# Altium PCB BioSig.PcbDoc
Units mm, origin at the board's own origin, x right, y up, seen from the top; angles counter-clockwise.
Board outline 53.34 x 66.19 mm, 2 copper layers (Top Layer, Bottom Layer); 27 components, 24 nets, 153 pads, 0 vias.
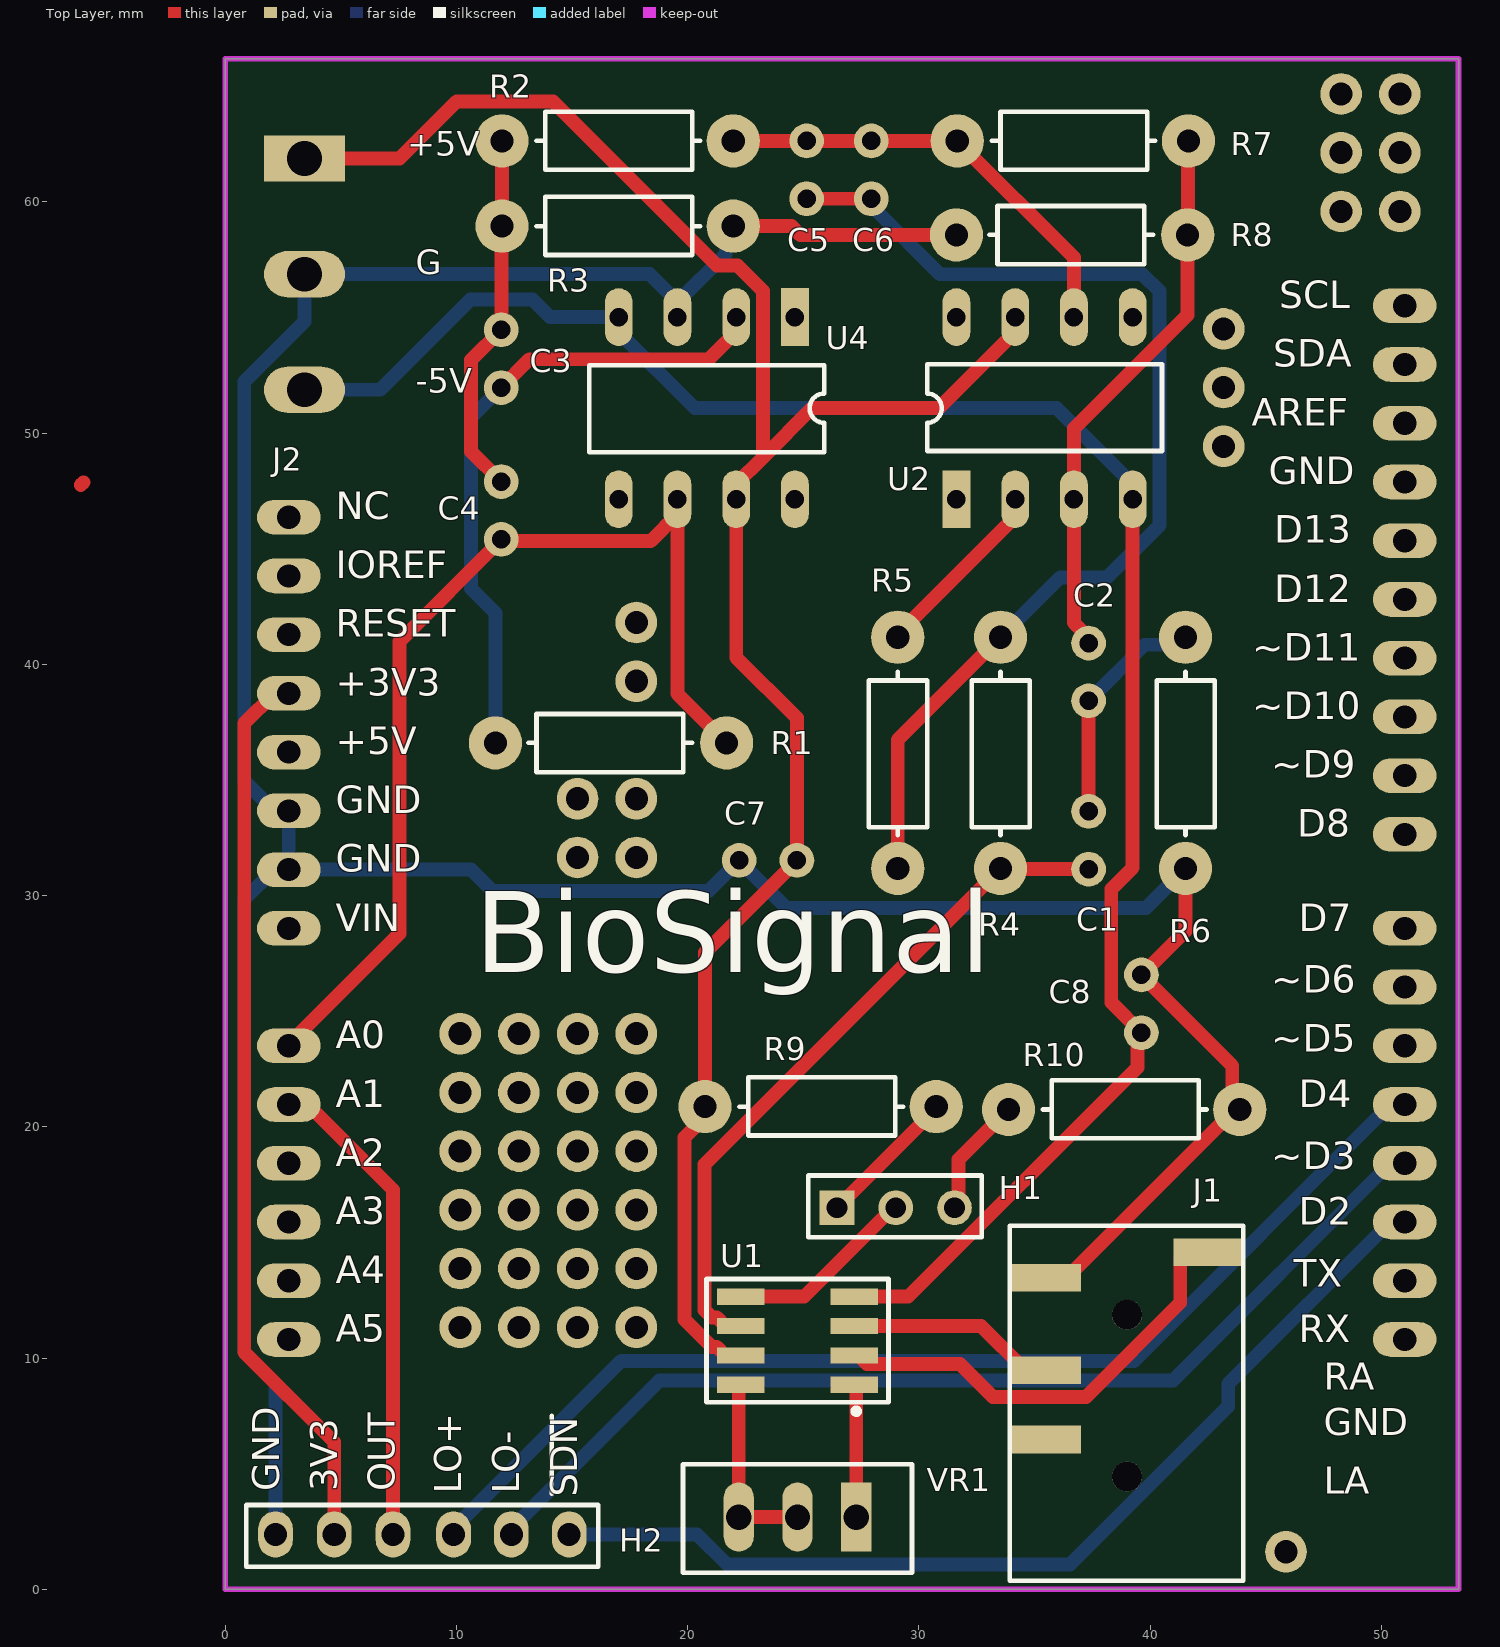
[diagram p0: Top Layer view]
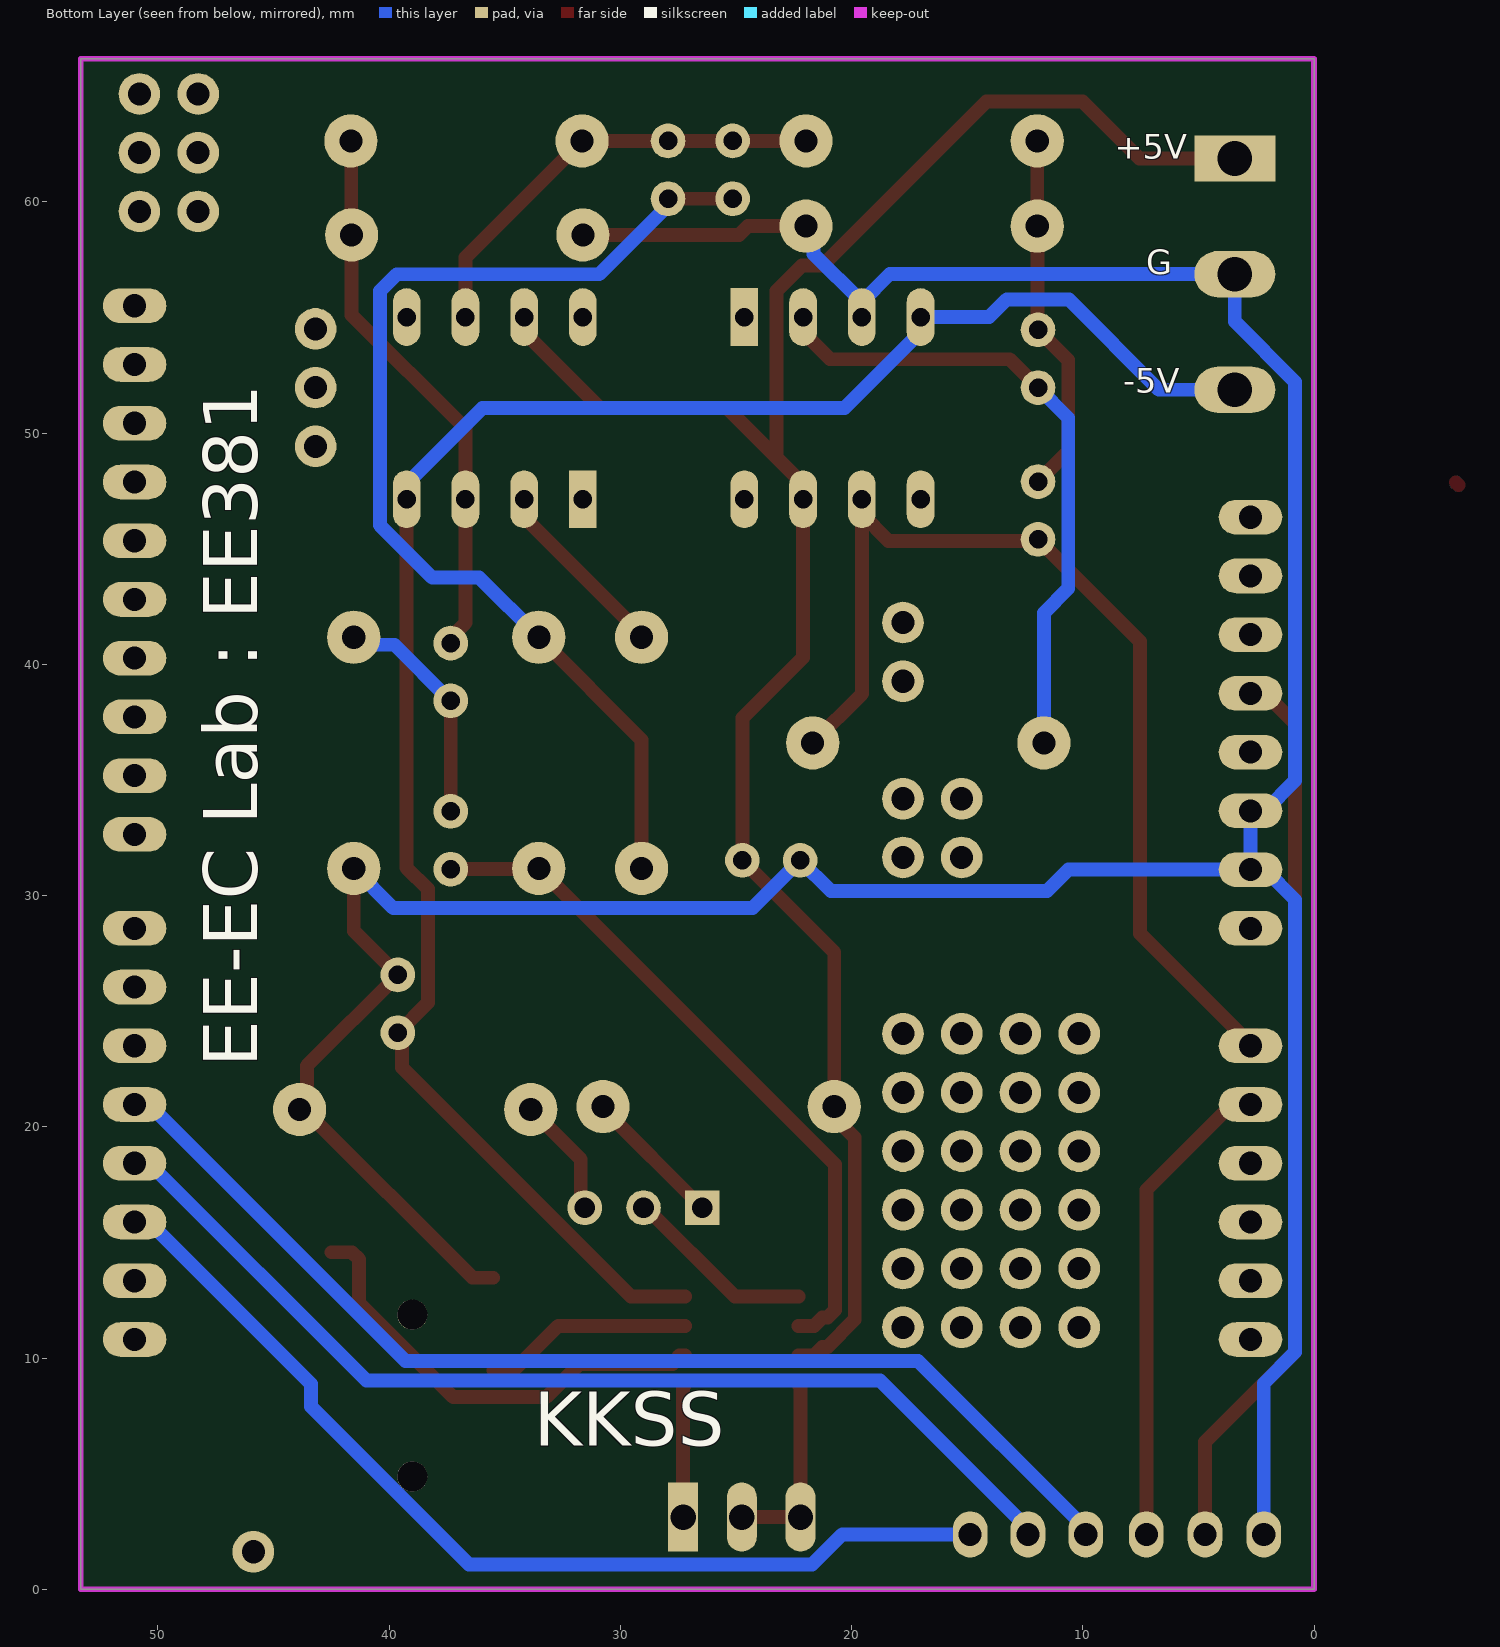
[diagram p1: Bottom Layer view, seen from below]

## Layer stack, top to bottom
Top Solder: solder mask 0.0102, Solder Resist, Dk 3.5
Top Layer: signal copper 0.0356
Dielectric 1: dielectric 0.32, FR-4, Dk 4.8
Bottom Layer: signal copper 0.0356
Bottom Solder: solder mask 0.0102, Solder Resist, Dk 3.5

## Board outline
0,0 53.34,0 53.34,66.194 0,66.194

## Design rules (kind name [scope] priority, off if disabled: settings)
Clearance [All] p1: gap=0.254 ignorepadtopadclearanceinfootprint=FALSE except(0: Arc-Hole Track-Hole SMDPad-Hole THPad-Hole Via-Hole Fill-Hole Poly-Hole Region-Hole Text-Hole)
PolygonConnect [All] p1: connectstyle=Relief reliefconductorwidth=0.254 reliefentries=4 polygonreliefangle="90 Angle" airgapwidth=0.254
RoutingVias [All] p1: holewidth=0.711 width=1.27 viastyle="Through Hole" minholewidth=0.711 minwidth=1.27 maxholewidth=0.711 maxwidth=1.27
SolderMaskExpansion [All] p1: expansion=0.102 istentingtop=FALSE
Width [All] p1: maxlimit=2 minlimit=0.254 preferedwidth=0.6 minimp=50.000000 maximp=50.000000 favimp=50.000000
30 further rules are at their usual default settings.

## Components (designator, comment, footprint, x,y, rotation, side; value= is the part's Value field where it differs from the comment)
BioSignal "ArduinoUnoShield" ArduinoUnoShield 51.01,28.585 r0 top (schematic designator BioSig)
C1 "Ceramic" Ceramic_Disc_P3.0 37.338,31.142 r90 top
C2 "Ceramic" Ceramic_Disc_P3.0 37.338,38.421 r90 top
C3 "Ceramic" Ceramic_Disc_P3.0 11.938,54.47 r270 top
C4 "Ceramic" Ceramic_Disc_P3.0 11.938,47.906 r270 top
C5 "Ceramic" Ceramic_Disc_P3.0 25.146,60.138 r90 top
C6 "Ceramic" Ceramic_Disc_P3.0 27.94,60.138 r90 top
C7 "Ceramic" Ceramic_Disc_P3.0 22.225,31.523 r0 top
C8 "Ceramic" Ceramic_Disc_P3.0 39.624,24.07 r90 top
H1 "Pin_Header_3x1_2.54" Pin_Header_3x1_2.54 29,16.5 r90 top
H2 "Pin_Header_6x1_2.54" Pin_Header_6x1_2.54 14.875,2.375 r270 top
J1 "Stereo_Jack" Stereo_Jack 39,4.875 r90 top
J2 "3P-5.0mm-Terminal-Block" 3P_5.0mm 3.429,56.876 r0 top
R1 "Resistor" Axial_10mm_0.7mm 11.684,36.603 r0 top
R2 "Resistor" Axial_10mm_0.7mm 21.971,62.638 r180 top
R3 "Resistor" Axial_10mm_0.7mm 21.971,58.955 r180 top
R4 "Resistor" Axial_10mm_0.7mm 33.528,31.175 r90 top
R5 "Resistor" Axial_10mm_0.7mm 29.083,31.175 r90 top
R6 "Resistor" Axial_10mm_0.7mm 41.529,31.175 r90 top
R7 "Resistor" Axial_10mm_0.7mm 41.656,62.638 r180 top
R8 "Resistor" Axial_10mm_0.7mm 31.623,58.574 r0 top
R9 "Resistor" Axial_10mm_0.7mm 30.75,20.875 r180 top
R10 "Resistor" Axial_10mm_0.7mm 43.875,20.75 r180 top
U1 "INA128" SOIC127P600X265-8N 24.75,10.75 r180 top
U2 "Op Amp" PDIP8 35.433,51.081 r90 top
U4 "Op Amp" PDIP8 20.828,51.081 r270 top
VR1 "VR" TrimPot 27.29,3.125 r270 top

## Footprints (in the part's own frame and the unit in brackets; to place one, negate y for a bottom-side part, rotate by r counter-clockwise, add the part's x,y. Pads: shape width x height; smd on the part's side, far side on the other; paste and mask are expansions set on the pad)
3P_5.0mm [mm]
  rect 3.5x2 hole 1.5: 1(0,5)
  oval 3.5x2 hole 1.5: 2(0,0) 3(0,-5)
  body extent -3.11,-7.39 4.49,7.61, height 9.8
ArduinoUnoShield [mm]
  oval 2.75x1.5 hole 1: 1(-48.26,17.78) 2(-48.26,15.24) 3(-48.26,12.7) 4(-48.26,10.16) 5(-48.26,7.62) 6(-48.26,5.08) 7(-48.26,2.54) 8(-48.26,0) 9(-48.26,-5.08) 10(-48.26,-7.62) 11(-48.26,-10.16) 12(-48.26,-12.7) 13(-48.26,-15.24) 14(-48.26,-17.78) 15(0,-17.78) 16(0,-15.24) 17(0,-12.7) 18(0,-10.16) 19(0,-7.62) 20(0,-5.08) 21(0,-2.54) 22(0,0) 23(0,4.064) 24(0,6.604) 25(0,9.144) 26(0,11.684) 27(0,14.224) 28(0,16.764) 29(0,19.304) 30(0,21.844) 31(0,24.384) 32(0,26.924)
  body extent -49.51,-19.05 1.24,28.19, height 2.5
Axial_10mm_0.7mm [mm]
  round 2.3 hole 1: 1(0,0) 2(10,0)
  silkscreen extent 1.43,-1.27 8.51,1.25, body extent -0.3,-1.2 10.46,1.2, height 2.41
Ceramic_Disc_P3.0 [mm]
  round 1.5 hole 0.8: 1(0,0) 2(2.5,0)
  body extent -0.46,-0.75 3.02,0.75, height 3.5
PDIP8 [mm]
  rect 2.5x1.2 hole 0.8: 1(-3.937,3.81)
  oval 2.5x1.2 hole 0.8: 2(-3.937,1.27) 3(-3.937,-1.27) 4(-3.937,-3.81) 5(3.937,-3.81) 6(3.937,-1.27) 7(3.937,1.27) 8(3.937,3.81)
  silkscreen extent -1.85,-5.08 1.91,5.08, body extent -3.93,-4.7 3.94,4.7, height 4.36
Pin_Header_3x1_2.54 [mm]
  rect 1.5x1.5 hole 0.9: 1(0,2.54)
  round 1.5 hole 0.9: 2(0,0) 3(0,-2.54)
  silkscreen extent -1.27,-3.71 1.4,3.79, body extent -1.09,-3.81 1.4,3.81, height 8.54
Pin_Header_6x1_2.54 [mm]
  oval 2x1.5 hole 1: 1(0,0) 2(0,-2.5) 3(0,-5) 4(0,-7.62) 5(0,-10.16) 6(0,-12.7)
  silkscreen extent -1.27,-13.97 1.4,1.25, body extent -1.22,-13.97 1.27,1.27, height 3
SOIC127P600X265-8N [mm] "SOIC, 8-Leads, Body 4.95x3.95mm, Pitch 1.27mm, IPC Medium Density"
  rect 2.05x0.7 smd: 1(-2.45,1.905) 2(-2.45,0.635) 3(-2.45,-0.635) 4(-2.45,-1.905) 5(2.45,-1.905) 6(2.45,-0.635) 7(2.45,0.635) 8(2.45,1.905)
  silkscreen extent -3.94,-2.67 3.94,3.17, body extent -3,-2.45 3,2.45, height 1.75
Stereo_Jack [mm] "SOIC, 8-Leads, Body 4.95x3.95mm, Pitch 1.27mm, IPC Medium Density"
  round 1.3 hole 1.3: 0(0,0) 0(7,0)
  rect 1.2x3 smd: 1(9.7,-3.5) 2(8.6,3.5) 3(4.6,3.5) 4(1.6,3.5)
  silkscreen extent -4.5,-5.03 10.85,5.08, body extent -3.55,-3.93 10.65,4.07, height 5
TrimPot [mm] "Vishay"
  rect 3x1.3 hole 1.1: 1(0,0)
  oval 3x1.3 hole 1.1: 2(0,-2.54) 3(0,-5.08)
  silkscreen extent -2.29,-7.49 2.41,2.41, body extent -2.16,-7.34 2.44,2.26, height 11.15

## Part data
C1 C2 C3 C4 C5 C6 C7 C8: library part Capacitor
U2 U4: library part UA741, "UA741-DIP"
VR1: library part TrimPot

## Free pads (board coordinates)
  round 1.8 hole 1: 39(10.16,24.03) 40(12.7,24.03) 41(15.24,24.03) 43(17.78,21.49) 44(15.24,21.49) 45(12.7,21.49) 46(10.16,21.49) 47(10.16,18.95) 48(12.7,18.95) 49(15.24,18.95) 50(17.78,18.95) 51(17.78,16.41) 52(15.24,16.41) 53(12.7,16.41) 54(10.16,16.41) 55(10.16,13.87) 56(12.7,13.87) 57(15.24,13.87) 58(17.78,13.87) 59(17.78,11.33) 60(12.7,11.33) 61(15.24,11.33) 62(10.16,11.33) 65(48.26,64.67) 66(50.8,64.67) 67(50.8,62.13) 68(48.26,62.13) 69(48.26,59.59) 70(50.8,59.59) 71(43.18,49.43) 72(43.18,51.97) 73(43.18,54.51) 74(17.78,24.03) 76(45.875,1.625) 80(15.24,34.19) 81(17.78,34.19) 82(17.78,31.65) 83(15.24,31.65) 90(17.78,41.81) 91(17.78,39.27)

## Nets (pads, with @x,y where several pads share a name; then routed paths per layer and width w, separated by ;. In a path a pad name is that pad's centre, name@x,y a point inside that pad or via, vN(x,y) a via of type N, cw(c..) or ccw(c..) an arc to the next point about the centre after c; other vN are vias at no path point)
3V3: BioSignal.4 H2.5 | length 39.1
  Top Layer w0.6: BioSignal.4 2.125,38.745 0.821,37.441 0.821,10.265 4.715,6.371 H2.5
+5V: C7.2 J2.1 R9.2 U1.7 U2.7 U4.7 | length 89.2
  Top Layer w0.6: J2.1 7.545,61.876 10.011,64.342 14.174,64.342 21.265,57.251 22.147,57.251 23.252,56.146 23.252,48.948 ; U1.7 21.625,10.115 21.259,10.481 21.046,10.481 19.867,11.66 19.867,19.532 20.75,20.415 R9.2 20.75,27.548 C7.2 24.725,37.678 22.098,40.305 U4.7 22.098,47.794 23.252,48.948 ; U2.7 34.163,54.368 30.876,51.081 25.385,51.081 23.252,48.948
-5V: C8.1 J2.3 U1.4 U2.4 U4.4 | length 83.7
  Top Layer w0.6: U1.4 29.539,12.655 39.452,22.568 39.452,23.898 C8.1 38.32,25.374 38.32,30.28 39.243,31.203 U2.4
  Bottom Layer w0.6: J2.3 6.703,51.876 10.601,55.774 13.293,55.774 14.049,55.018 U4.4 17.018,54.368 20.305,51.081 35.956,51.081 39.243,47.794 U2.4
GND: BioSignal.6 BioSignal.7 C7.1 C8.2 H2.6 J1.2 J2.2 R3.1 R6.1 R8.1 R10.1 U4.3 | length 155.5
  Top Layer w0.6: R3.1 24.485,58.955 24.866,58.574 R8.1 ; J1.2 36.4,13.475 43.675,20.75 R10.1 43.55,21.075 43.55,22.644 C8.2 41.529,28.475 R6.1
  Bottom Layer w0.6: H2.6 2.175,8.911 0.821,10.265 0.821,29.821 2.125,31.125 BioSignal.7 ; U4.3 U4.3@19.558,55.668 ; R3.1 21.646,58.63 21.646,57.756 U4.3@19.558,55.668 ; R6.1 39.825,29.471 24.277,29.471 C7.1 20.898,30.196 11.551,30.196 10.622,31.125 BioSignal.7 ; BioSignal.7 BioSignal.6 2.125,33.665 0.821,34.969 0.821,52.216 3.429,54.824 J2.2 18.35,56.876 U4.3@19.558,55.668
LA: J1.3 U1.3 | length 9.1
  Top Layer w0.6: U1.3 32.69,11.385 34.6,9.475 J1.3
NetBioSig_9: BioSignal.9 C4.2 R1.2 U4.6 | length 45.7
  Top Layer w0.6: BioSignal.9@2.5,23.95 3.125,23.95 7.532,28.357 7.532,41 C4.2 12.004,45.34 18.404,45.34 U4.6@19.558,46.494 ; U4.6 U4.6@19.558,46.494 ; R1.2 19.558,38.729 U4.6@19.558,46.494
  Bottom Layer w0.6: C4.2@11.75,45.75 11.75,45.594 C4.2
NetBioSig_10: BioSignal.10 H2.4 | length 21.4
  Top Layer w0.6: BioSignal.10@2.5,21.41 3.125,21.41 7.255,17.28 H2.4
NetBioSig_17: BioSignal.17 H2.1 | length 43.4
  Bottom Layer w0.6: H2.1 20.407,2.375 21.711,1.071 36.54,1.071 43.376,7.908 43.376,8.876 50.385,15.885 BioSignal.17
NetBioSig_18: BioSignal.18 H2.2 | length 45.4
  Bottom Layer w0.6: H2.2 12.375,2.625 18.772,9.022 40.982,9.022 50.385,18.425 BioSignal.18
NetBioSig_19: BioSignal.19 H2.3 | length 49
  Bottom Layer w0.6: H2.3 9.875,2.625 17.126,9.876 39.296,9.876 50.385,20.965 BioSignal.19
NetC1_1: C1.1 R4.1 U1.6 | length 30.1
  Top Layer w0.6: U1.6 21.625,11.385 21.259,11.751 21.046,11.751 20.721,12.076 20.721,18.368 R4.1 33.544,31.159 37.322,31.159 C1.1
NetC1_2: C1.2 C2.1 R6.2 | length 10.1
  Top Layer w0.6: C1.2 C2.1
  Bottom Layer w0.6: C2.1 39.767,40.85 41.204,40.85 R6.2
NetC2_2: C2.2 R7.1 R8.2 U2.3 | length 24
  Top Layer w0.6: C2.2 37.338,41.165 36.703,41.8 U2.3 36.703,50.196 41.623,55.116 R8.2 41.64,58.591 41.64,62.622 R7.1
NetC3_1: C3.1 C4.1 R2.2 R3.2 | length 15.9
  Top Layer w0.6: C4.1 10.634,49.21 10.634,53.166 C3.1 11.954,54.487 11.954,58.939 R3.2 R2.2
  Bottom Layer w0.6: C4.1@11.875,48 11.875,47.969 C4.1
NetC3_2: C3.2 R1.1 U4.2 | length 28.1
  Top Layer w0.6: C3.2 13.166,53.198 20.928,53.198 22.098,54.368 U4.2
  Bottom Layer w0.6: R1.1 11.684,42.23 10.634,43.28 10.634,50.666 C3.2
NetC5_1: C5.1 C6.1 R4.2 R5.1 | length 47.9
  Top Layer w0.6: C5.1 C6.1 ; R5.1 29.083,36.73 R4.2
  Bottom Layer w0.6: C6.1 28.112,59.966 28.112,59.675 30.917,56.87 39.673,56.87 40.397,56.146 40.397,46.016 38.139,43.758 36.111,43.758 R4.2
NetC5_2: C5.2 C6.2 R2.1 R7.2 U2.6 | length 19.4
  Top Layer w0.6: R2.1 C6.2 R7.2 36.703,57.591 U2.6
NetH1_1: H1.1 R9.1 | length 6.2
  Top Layer w0.6: H1.1 30.75,20.79 R9.1
NetH1_2: H1.2 U1.5 | length 8.3
  Top Layer w0.6: U1.5 25.042,12.655 28.887,16.5 H1.2
NetH1_3: H1.3 R10.2 | length 5.2
  Top Layer w0.6: H1.3 31.712,16.672 31.712,18.587 R10.2
NetR5_2: R5.2 U2.2 | length 8.1
  Top Layer w0.6: R5.2 29.083,41.294 34.163,46.374 U2.2
NetU1_1: U1.1 VR1.1 | length 5.8
  Top Layer w0.6: U1.1 27.24,8.845 27.29,8.795 VR1.1
NetU1_8: U1.8 VR1.2 VR1.3 | length 8.3
  Top Layer w0.6: U1.8 22.26,8.845 22.21,8.795 VR1.3 VR1.2
RA: J1.1 U1.2 | length 19.8
  Top Layer w0.6: U1.2 27.45,10.115 27.5,10.065 27.5,10 27.751,9.749 31.776,9.749 33.204,8.321 37.229,8.321 41.3,12.392 41.3,14.275 41.6,14.575 J1.1
pads on no net: BioSignal.1 BioSignal.2 BioSignal.3 BioSignal.5 BioSignal.8 BioSignal.11 BioSignal.12 BioSignal.13 BioSignal.14 BioSignal.15 BioSignal.16 BioSignal.20 BioSignal.21 BioSignal.22 BioSignal.23 BioSignal.24 BioSignal.25 BioSignal.26 BioSignal.27 BioSignal.28 BioSignal.29 BioSignal.30 BioSignal.31 BioSignal.32 J1.0 J1.4 U2.1 U2.5 U2.8 U4.1 U4.5 U4.8
copper on no net: | length 0.2
  Top Layer w0.6: -6.25,47.75 -6.125,47.875

## Keep-outs
Keep-Out Layer:
  the board outline again, w0.254

## Silkscreen, mask and mechanical layers (free items; w line width, h text height)
Top Overlay:
  lines w0.2: 14.125,4.125 14.125,7.5
  text "+5V" at 7.875,61.644 h1.8
  text "G" at 8.25,56.519 h1.8
  text "-5V" at 8.25,51.394 h1.8
  text "RA" at 47.5,8.25 h2
  text "GND" at 47.5,6.272 h2
  text "GND" at 2.728,4.25 h2 r90
  text "3V3" at 5.228,4.25 h2 r90
  text "OUT" at 7.728,4.25 h2 r90
  text "LO+" at 10.603,4.125 h2 r90
  text "LO-" at 13.103,4.125 h2 r90
  text "SDN" at 15.603,4 h2 r90
  text "LA" at 47.5,3.75 h2
Bottom Overlay:
  text "+5V" at 8.625,61.519 h1.8
  text "G" at 7.25,56.519 h1.8
  text "-5V" at 8.25,51.394 h1.8
  text "EE-EC Lab : EE381" at 44.922,22.567 h4 r270
  text "KKSS" at 33.75,5.419 h4

## Text inside footprints (layer, text, board x,y; h text height)
BioSignal: Top Overlay "SCL" at 45.591,55.023 h2.03; Top Overlay "RX" at 46.438,10.297 h2.03; Top Overlay "TX" at 46.205,12.695 h2.03; Top Overlay "D4" at 46.438,20.457 h2.03; Top Overlay "~D5" at 45.237,22.866 h2.03; Top Overlay "D2" at 46.438,15.377 h2.03; Top Overlay "~D3" at 45.247,17.783 h2.03; Top Overlay "~D6" at 45.247,25.403 h2.03; Top Overlay "D7" at 46.438,28.077 h2.03; Top Overlay "A5" at 4.78,10.319 h2.03; Top Overlay "A4" at 4.78,12.837 h2.03; Top Overlay "A3" at 4.78,15.399 h2.03; Top Overlay "A2" at 4.78,17.917 h2.03; Top Overlay "A1" at 4.78,20.457 h2.03; Top Overlay "A0" at 4.78,23.019 h2.03; Top Overlay "GND" at 4.782,33.179 h2.03; Top Overlay "+5V" at 4.782,35.719 h2.03; Top Overlay "+3V3" at 4.782,38.259 h2.03; Top Overlay "RESET" at 4.782,40.799 h2.03; Top Overlay "IOREF" at 4.782,43.339 h2.03; Top Overlay "NC" at 4.782,45.879 h2.03; Top Overlay "GND" at 4.782,30.639 h2.03; Top Overlay "VIN" at 4.784,28.077 h2.03; Top Overlay "D12" at 45.374,42.301 h2.03; Top Overlay "D13" at 45.361,44.863 h2.03; Top Overlay "GND" at 45.133,47.403 h2.03; Top Overlay "AREF" at 44.404,49.921 h2.03; Top Overlay "SDA" at 45.326,52.483 h2.03; Top Overlay "~D11" at 44.406,39.761 h2.03; Top Overlay "~D10" at 44.406,37.243 h2.03; Top Overlay "~D9" at 45.244,34.703 h2.03; Top Overlay "D8" at 46.367,32.163 h2.03